# Altium PCB PCB1.PcbDoc
Units mil, origin at the board's own origin, x right, y up, seen from the top; angles counter-clockwise.
Board outline 820 x 2400 mil, 2 copper layers (Top Layer, Bottom Layer); 18 components, 12 nets, 78 pads, 19 vias.
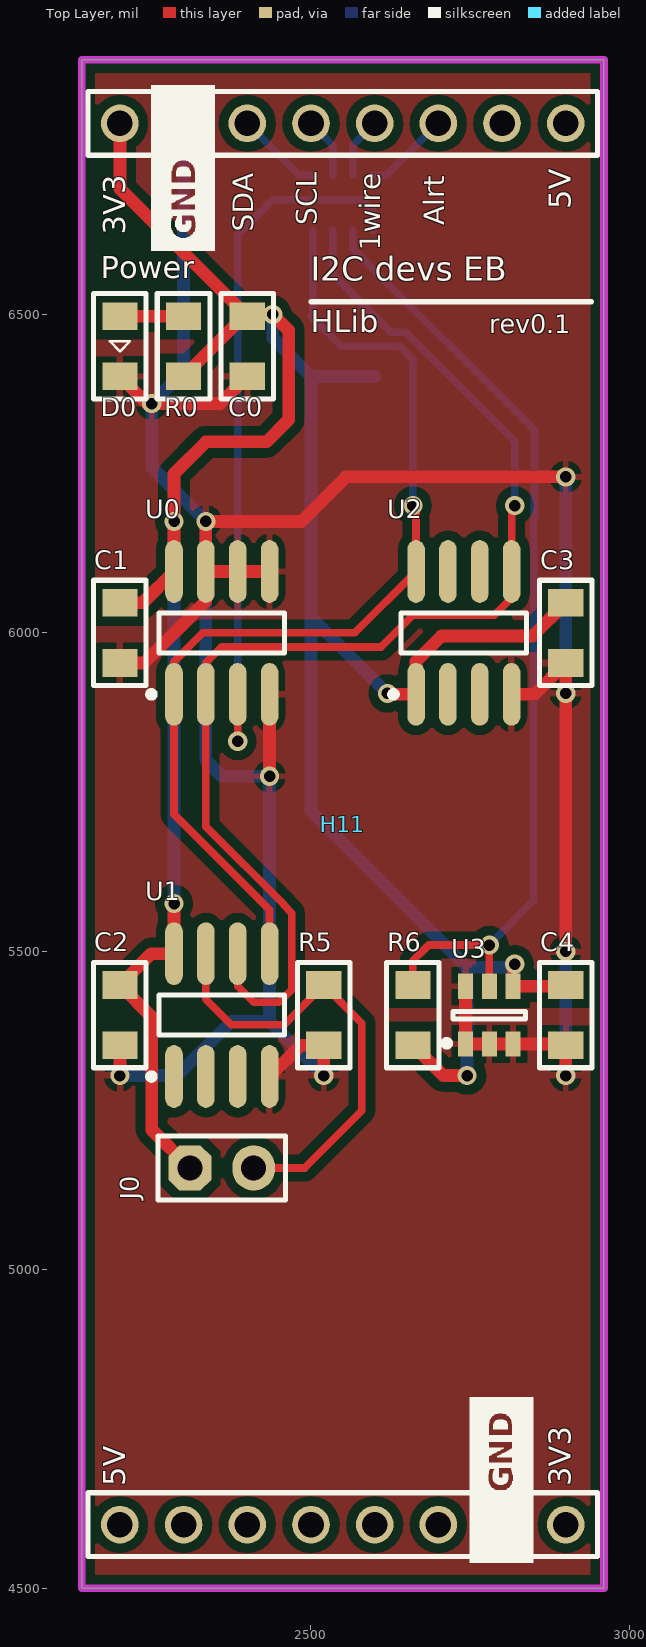
[diagram p0: Top Layer view]
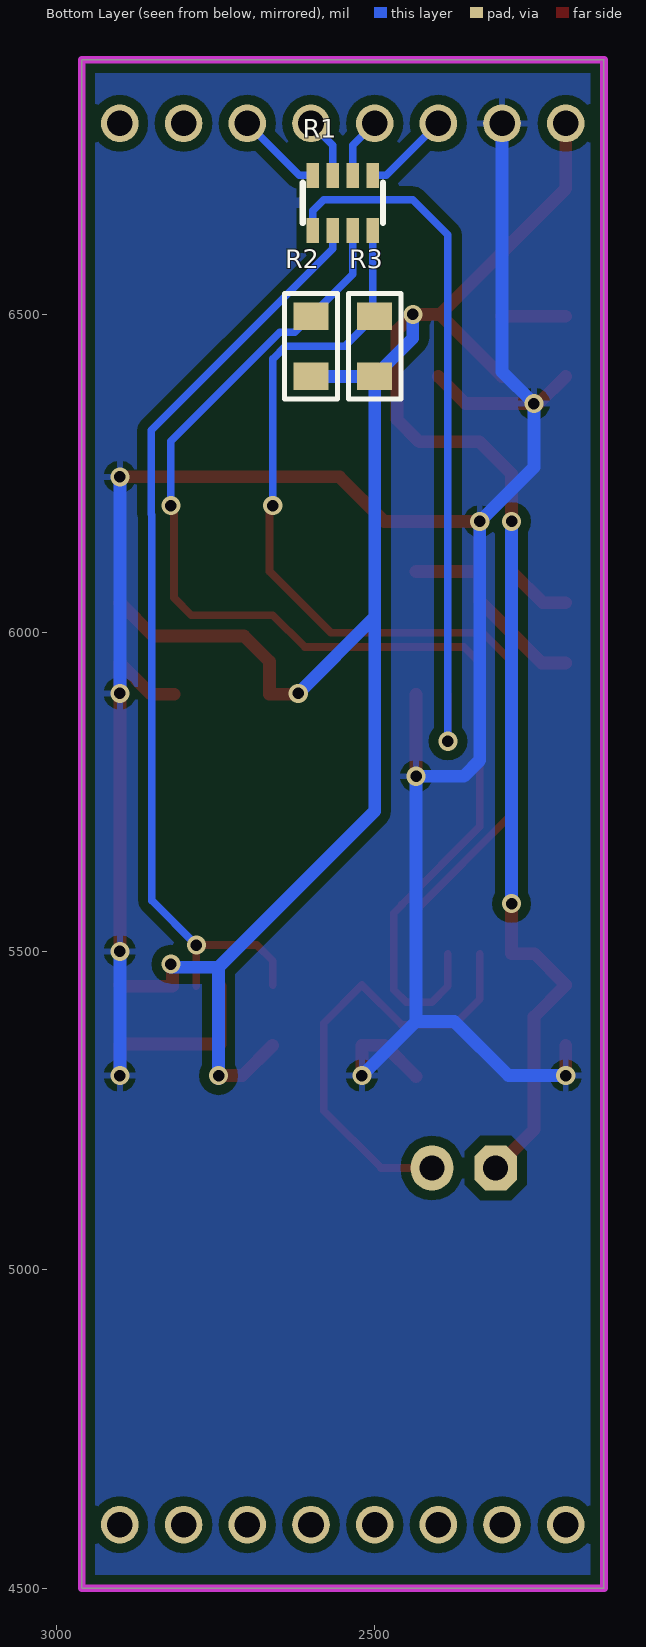
[diagram p1: Bottom Layer view, seen from below]
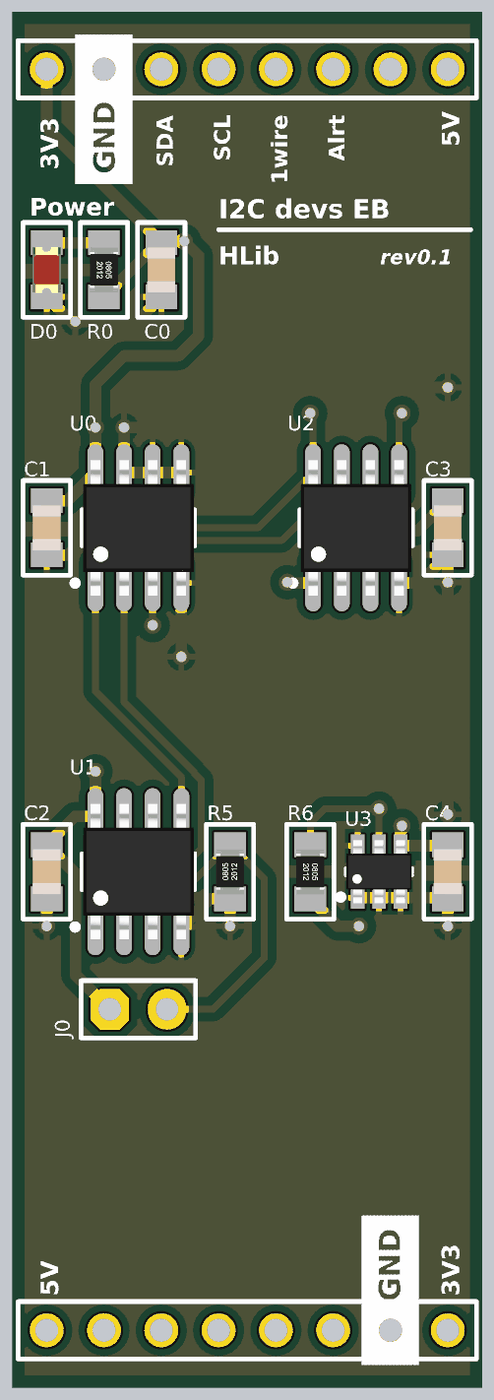
[diagram p2: 3D render of the assembled board from above, using the file's embedded part models]
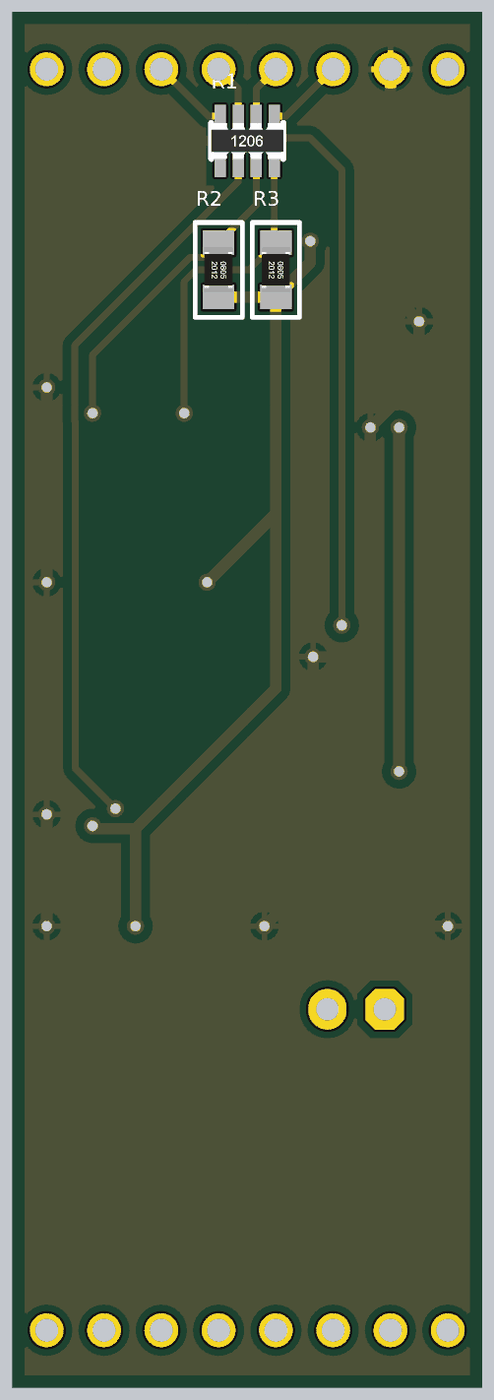
[diagram p3: 3D render of the assembled board from below, using the file's embedded part models]

## Layer stack, top to bottom
Top Layer: signal copper 1.4
Dielectric: dielectric 12.6, FR-4, Dk 4.8
Bottom Layer: signal copper 1.4

## Board outline
2140,4500 2140,6900 2960,6900 2960,4500

## Design rules (kind name [scope] priority, off if disabled: settings)
Clearance [InPolygon] p1: gap=15
Clearance Clearance_1 [All] p2: gap=10
PolygonConnect [All] p1: connectstyle=Relief reliefconductorwidth=10 reliefentries=4 polygonreliefangle="90 Angle" airgapwidth=10
RoutingVias [All] p1: holewidth=25 width=40 viastyle="Through Hole" minholewidth=28 minwidth=50 maxholewidth=28 maxwidth=50
SolderMaskExpansion [All] p1: expansion=4
Width [All] p1: maxlimit=25 minlimit=8 preferedwidth=10
28 further rules are at their usual default settings.

## Components (designator, comment, footprint, x,y, rotation, side; value= is the part's Value field where it differs from the comment)
C0 "C_Ceramic" SM_0805_C_CERAMIC 2400,6450 r90 top
C1 "C_Ceramic" SM_0805_C_CERAMIC 2200,6000 r90 top
C2 "C_Ceramic" SM_0805_C_CERAMIC 2200,5400 r270 top
C3 "C_Ceramic" SM_0805_C_CERAMIC 2900,6000 r270 top
C4 "C_Ceramic" SM_0805_C_CERAMIC 2900,5400 r270 top
D0 "LED" SM_0805_LED 2200,6450 r270 top
H11 "MBoard1_BH_DualPorts" MBoard1_BH_DualPorts 2200,6800 r0 top
J0 "Jumper 2" HD_MALE_2_100mil_straight 2310,5160 r0 top
R0 "R" SM_0805_R 2300,6450 r270 top
R1 "220" RA4 2550,6675 r180 bottom
R2 "R" SM_0805_R 2600,6450 r270 bottom
R3 "R" SM_0805_R 2500,6450 r270 bottom
R5 "R" SM_0805_R 2520,5400 r90 top
R6 "R" SM_0805_R 2660,5400 r270 top
U0 "TMP275" SO-8 2360,6000 r90 top
U1 "24LC04B" SO-8 2360,5400 r90 top
U2 "TSL2550" SO-8 2740,6000 r90 top
U3 "TMP141" SOT23-6 2780,5400 r90 top

## Footprints (in the part's own frame and the unit in brackets; to place one, negate y for a bottom-side part, rotate by r counter-clockwise, add the part's x,y. Pads: shape width x height; smd on the part's side, far side on the other; paste and mask are expansions set on the pad)
HD_MALE_2_100mil_straight [mm]
  oct 1.7x1.8 hole 1: 1(0,0)
  oval 1.7x1.8 hole 1: 2(2.54,0)
  silkscreen extent -1.27,-1.27 3.81,1.27, body extent -1.27,-1.27 3.81,1.27, height 8
MBoard1_BH_DualPorts [mm]
  round 1.5 hole 1.02: 1(0,0) 2(2.54,0) 3(5.08,0) 4(7.62,0) 5(10.16,0) 6(12.7,0) 7(15.24,0) 8(17.78,0) 9(17.78,-55.88) 10(15.24,-55.88) 11(12.7,-55.88) 12(10.16,-55.88) 13(7.62,-55.88) 14(5.08,-55.88) 15(2.54,-55.88) 16(0,-55.88)
  silkscreen extent -1.27,-57.15 19.05,1.27, body extent -1.27,-57.15 19.05,1.27, height 8
RA4 [mm] "Resistor Array (0603x4) form TME"
  rect 0.5x1 smd: 1(-1.2,-1.1) 2(-1.2,1.1) 3(-0.4,-1.1) 4(-0.4,1.1) 5(0.4,-1.1) 6(0.4,1.1) 7(1.2,-1.1) 8(1.2,1.1)
  silkscreen extent -1.6,-0.8 1.6,0.8, body extent -1.6,-0.8 1.6,0.8, height 0.5
SM_0805_C_CERAMIC [mm] "General Surface-mount cap, low density"
  rect 1.1x1.4 smd: 1(-1.2,0) 2(1.2,0)
  silkscreen extent -2.1,-1.05 2.1,1.05, body extent -1,-0.62 1,0.63, height 0.58
SM_0805_LED [mm] "General polarized surface-mount Led, low density"
  rect 1.1x1.4 smd: 1(-1.2,0) 2(1.2,0)
  silkscreen extent -2.1,-1.05 2.1,1.05, body extent -1.01,-0.62 1.01,0.63, height 1.1
SM_0805_R [mm] "General Surface-mount resistor, low density"
  rect 1.1x1.4 smd: 1(-1.2,0) 2(1.2,0)
  silkscreen extent -2.1,-1.05 2.1,1.05, body extent -1,-0.63 1,0.62, height 0.45
SO-8 [mm]
  oval 2.5x0.7 smd: 1(-2.45,1.905) 2(-2.45,0.635) 3(-2.45,-0.635) 4(-2.45,-1.905) 5(2.45,-1.905) 6(2.45,-0.635) 7(2.45,0.635) 8(2.45,1.905)
  silkscreen extent -2.57,-2.5 0.8,2.93, body extent -3,-2.45 3,2.45, height 1.75
SOT23-6 [mm]
  rect 1x0.6 smd: 1(-1.15,0.95) 2(-1.15,0) 3(-1.15,-0.95) 4(1.15,-0.95) 5(1.15,0) 6(1.15,0.95)
  silkscreen extent -1.25,-1.45 0.15,1.82, body extent -1.4,-1.45 1.4,1.45, height 1.45

## Part data
C0 C1 C2 C3 C4: "Non-polarity ceramic capacitor"
J0: library part "JP 2"
R0 R2 R3 R5 R6: "Resistor"
R1: library part RA4
U0: library part TMP75C
U1: library part 24Cxx, "Standard 2-Wire Bus Interface Serial EEPROM"

## Via types
v1: diameter 30, hole 18, Top Layer to Bottom Layer, tented both sides, 19 vias

## Nets (pads, with @x,y where several pads share a name; then routed paths per layer and width w, separated by ;. In a path a pad name is that pad's centre, name@x,y a point inside that pad or via, vN(x,y) a via of type N, cw(c..) or ccw(c..) an arc to the next point about the centre after c; other vN are vias at no path point)
1WIRE: R1.3 R6.1 U3.5 | length 1502.1
  Top Layer w12: R6.1 2660,5485 2685,5510 v1(2780,5510) U3.5
  Bottom Layer w12: R1.3 2565.75,6603.34 2851,6318.08 2851,6186.16 2850,6185.16 2850,5580 v1(2780,5510)
3V3: C0.2 C1.2 C2.1 C3.1 C4.1 H11.1 J0.1 R0.2 R2.2 R3.2 R6.2 U0.8 U1.8 U2.1 U3.4 | length 4598.5
  Top Layer w20: C1.2 2235.79,6047.24 U0.8 v1(2285,6175) 2285,6250 2335,6300 2430,6300 2465,6335 2465,6475 v1(2440,6500) C0.2@2397.24,6500 ; H11.1 2200,6697.24 C0.2@2397.24,6500 ; v1(2285,5575) U1.8 2249.21,5496.46 C2.1 2250,5397.24 2250,5220 J0.1 ; R0.2 C0.2@2397.24,6500 ; v1(2620,5905) 2621.46,5903.54 U2.1 2665,5955 2705,5995 2847.76,5995 C3.1 ; R6.2 2707.76,5305 v1(2745,5305) ; v1(2820,5480) 2817.4,5477.4 U3.4 2898.03,5445.28 C4.1
  Bottom Layer w20: v1(2285,5575) v1(2285,6175) ; v1(2440,6500) 2440,6462.76 R3.2 ; R2.2 R3.2 ; v1(2620,5905) 2500,6025 ; v1@2745,5300 v1(2745,5305) 2745,5475 ; v1(2820,5480) 2820,5475 2745,5475 ; 2500,6025 2500,5720 2745,5475 ; 2500,6025 R3.2
GND: C0.1 C1.1 C2.2 C3.2 C4.2 D0.2 H11.2 R5.1 U0.4 U0.5 U0.6 U0.7 U1.4 U2.4 U3.1 U3.2 U3.3 U3.6 | length 4895.5
  Top Layer w20: v1(2200,5305) C2.2 ; C1.1 2237.76,5952.76 2335,6050 U0.7 ; D0.2 2242.76,6360 v1(2250,6360) 2357.24,6360 C0.1 ; U1.4 2484.21,5352.76 R5.1 v1(2520,5305) ; v1(2435,5775) U0.4 ; U0.5 U0.6 U0.7 ; U3.6 U3.1 U3.2 U3.3 2898.03,5354.72 C4.2 v1(2900,5305) ; U2.4 2850.79,5903.54 C3.2 v1(2900,5905) v1(2900,5500) ; v1(2900,6245) 2555,6245 2485,6175 v1(2335,6175) U0.7
  Bottom Layer w20: v1(2200,5305) 2290,5305 2375,5390 2435,5390 ; H11.2 2300,6410 v1(2250,6360) 2250,6260 v1(2335,6175) 2335,5800 2360,5775 v1(2435,5775) 2435,5390 ; v1(2520,5305) 2435,5390 ; v1@2900,5300 v1(2900,5305) v1(2900,5500) ; v1(2900,5905) v1(2900,6245)
NetD0_1: D0.1 R0.1 | length 100
  Top Layer w20: D0.1 R0.1
NetH11_3: H11.3 R1.8 | length 136.6
  Bottom Layer w12: H11.3 2481.69,6718.31 R1.8
NetH11_4: H11.4 R1.6 | length 95.9
  Bottom Layer w12: H11.4 2534.25,6765.75 R1.6
NetH11_5: H11.5 R1.4 | length 95.9
  Bottom Layer w12: R1.4 2565.75,6765.75 H11.5
NetH11_6: H11.6 R1.2 | length 136.6
  Bottom Layer w12: R1.2 2618.31,6718.31 H11.6
NetJ0_2: J0.2 R5.2 U1.7 | length 728.2
  Top Layer w12: U1.7 2335,5425 2375,5385 2457.76,5385 R5.2 2580,5387.24 2580,5250 2490,5160 J0.2
SCL: R1.5 R2.1 U0.2 U1.6 U2.5 | length 1957.4
  Top Layer w12: U1.6 2385,5445 2410,5420 2450,5420 2470,5440 2470,5560 2457,5573 2457,5574.11 2335,5696.11 U0.2 2335,5953 2360,5978 2610,5978 2660,6028 2788,6028 2815,6055 U2.5 2815,6195 v1(2820,6200)
  Bottom Layer w12: R1.5 2534.25,6562.99 R2.1 2625.24,6472 2649.11,6472 2820,6301.11 v1(2820,6200)
SDA: R1.7 R3.1 U0.1 U1.5 U2.8 | length 1618.3
  Top Layer w12: U1.5 2435,5565 2285,5715 U0.1 2285,5955 2330,6000 2568.54,6000 U2.8 2665,6195 v1(2660,6200)
  Bottom Layer w12: R1.7 2502.76,6500 R3.1 2547.24,6450 2640,6450 2660,6430 v1(2660,6200)
T_ALT: R1.1 U0.3 | length 1141.8
  Top Layer w12: v1(2385,5830) U0.3
  Bottom Layer w12: v1(2385,5830) 2385,6625 2440,6680 2580,6680 2597.24,6662.76 R1.1
pads on no net: H11.7 H11.8 H11.9 H11.10 H11.11 H11.12 H11.13 H11.14 H11.15 H11.16 U1.1 U1.2 U1.3 U2.2 U2.3 U2.6 U2.7

## Polygon pours and split planes (outlines as drawn)
GND on Top Layer "Top Layer-GND" (solid, remove dead copper, pour order 4): 2140,6900 2960,6900 2960,4500 2140,4500
GND on Bottom Layer "Top Layer-GND" (solid, remove dead copper, pour order 6): 2140,6900 2960,6900 2960,4500 2140,4500

## Keep-outs
Keep-Out Layer:
  the board outline again, w12

## Silkscreen, mask and mechanical layers (free items; w line width, h text height)
Top Overlay:
  drawing of 607 lines, arcs and shapes, not listed
  text "5V" at 2920,6665 h60 r90
  text "SCL" at 2520,6640 h55 r90
  text "Alrt" at 2720,6640 h55 r90
  text "SDA" at 2420,6630 h55 r90
  text "3V3" at 2220,6625 h60 r90
  text "1wire" at 2620,6600 h55 r90
  text "Power" at 2170,6545 h60
  text "I2C devs EB" at 2500,6540 h65
  text "HLib" at 2500,6460 h60
  text "rev0.1" at 2780,6460 h50
  text "5V" at 2220,4660 h60 r90
  text "3V3" at 2920,4660 h60 r90
Drill Drawing:
  text ".LEGEND" at 7200,3200 h60
  text "Drill Drawing." at 7200,3100 h60

## Dimensions
2140,4500 to 2140,6900 on Mechanical 1
2140,4500 to 2960,4500 on Mechanical 1